# Altium PCB Hx711工训赛.pcbdoc
Units mm, origin at the board's own origin, x right, y up, seen from the top; angles counter-clockwise.
Board outline 45.13 x 45.13 mm, 2 copper layers (Top Layer, Bottom Layer); 11 components, 11 nets, 43 pads, 0 vias.
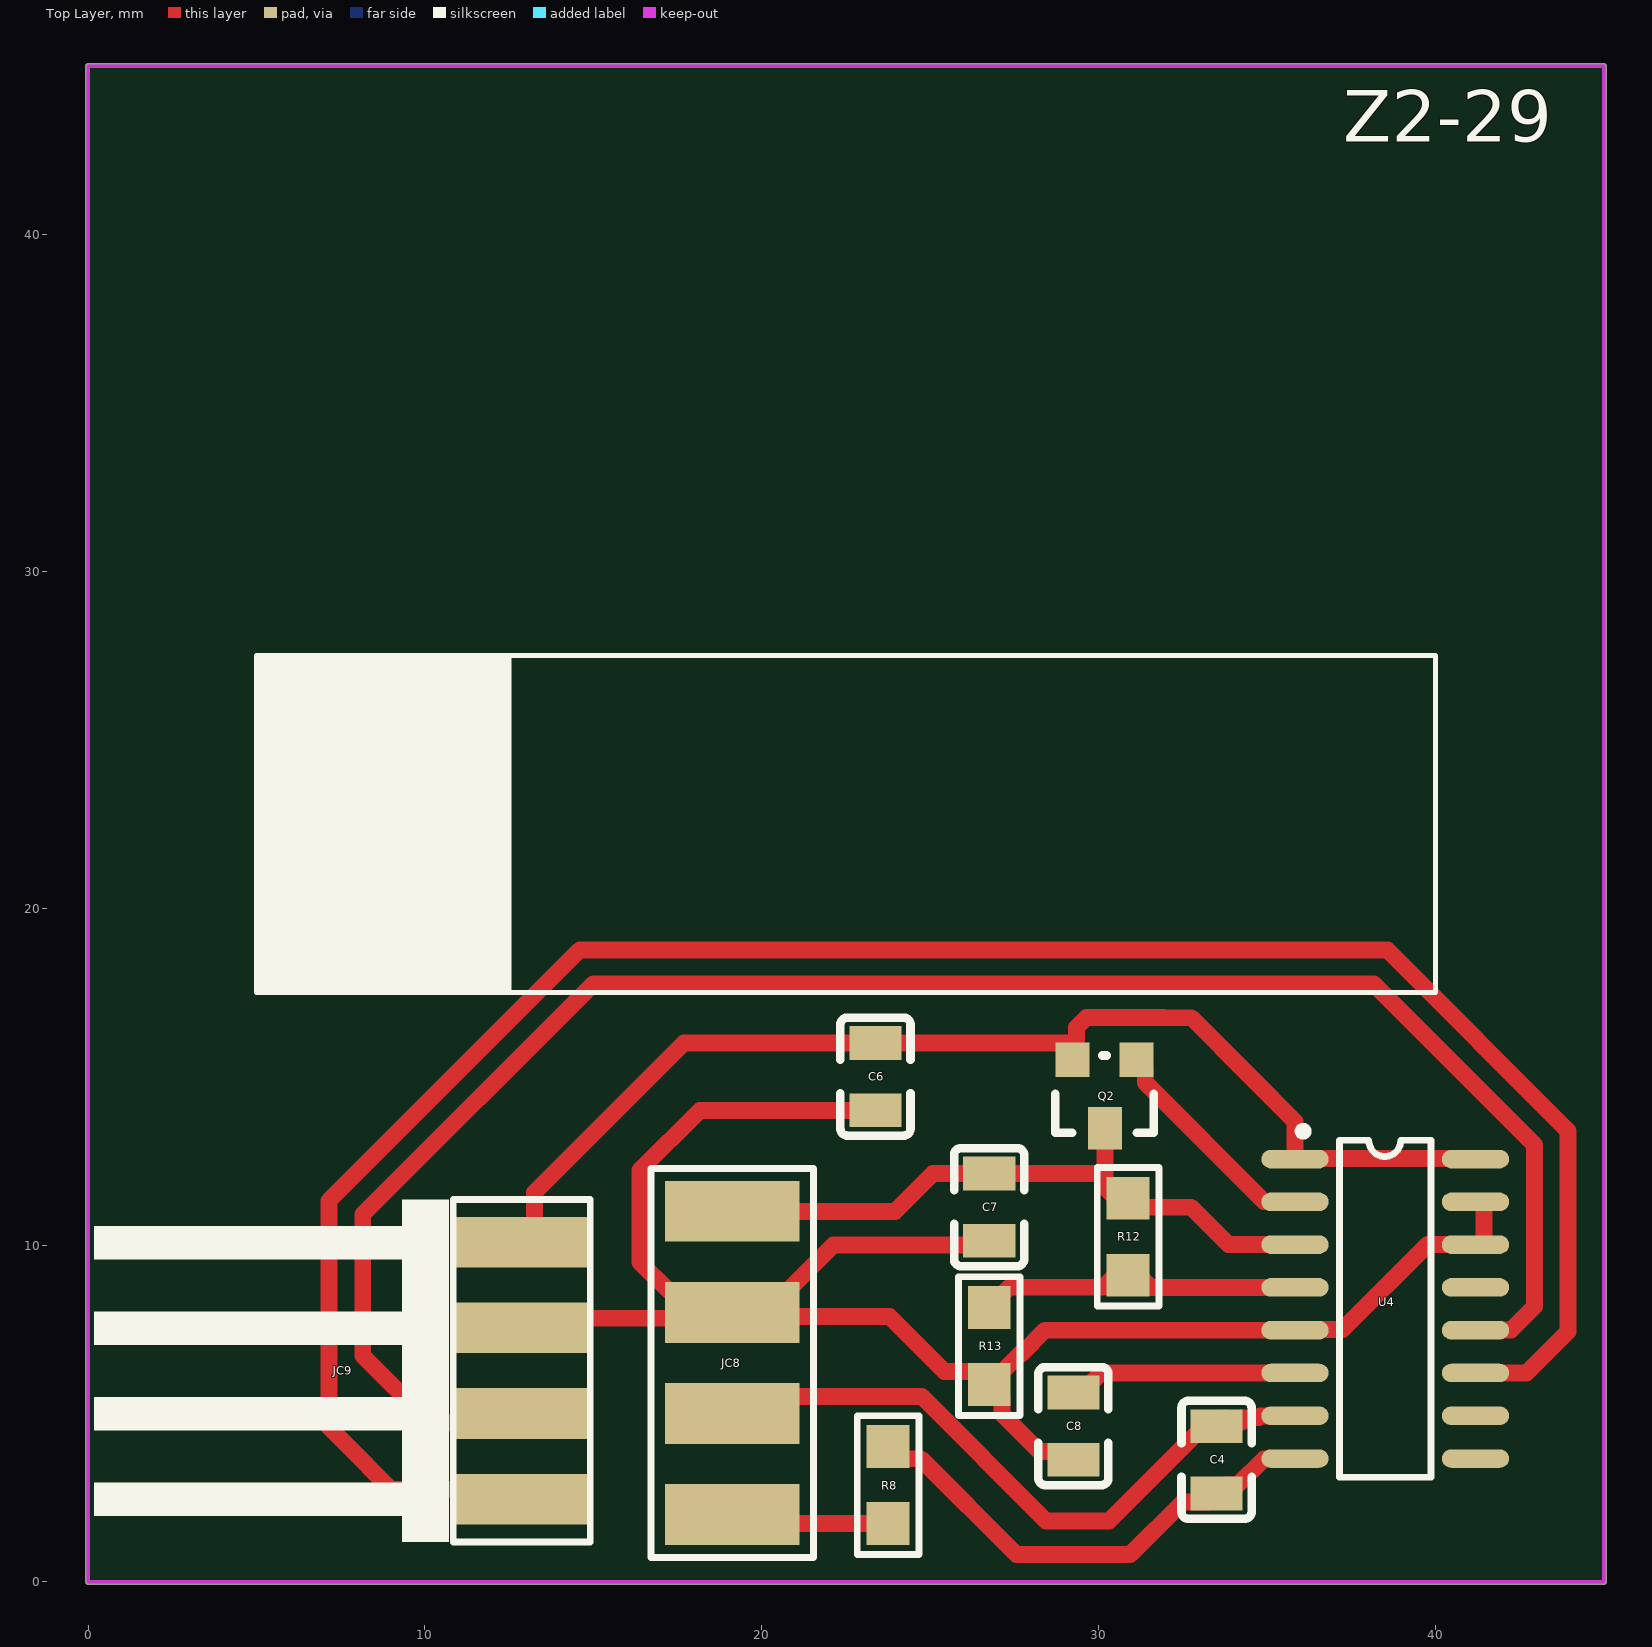
[diagram p0: Top Layer view]
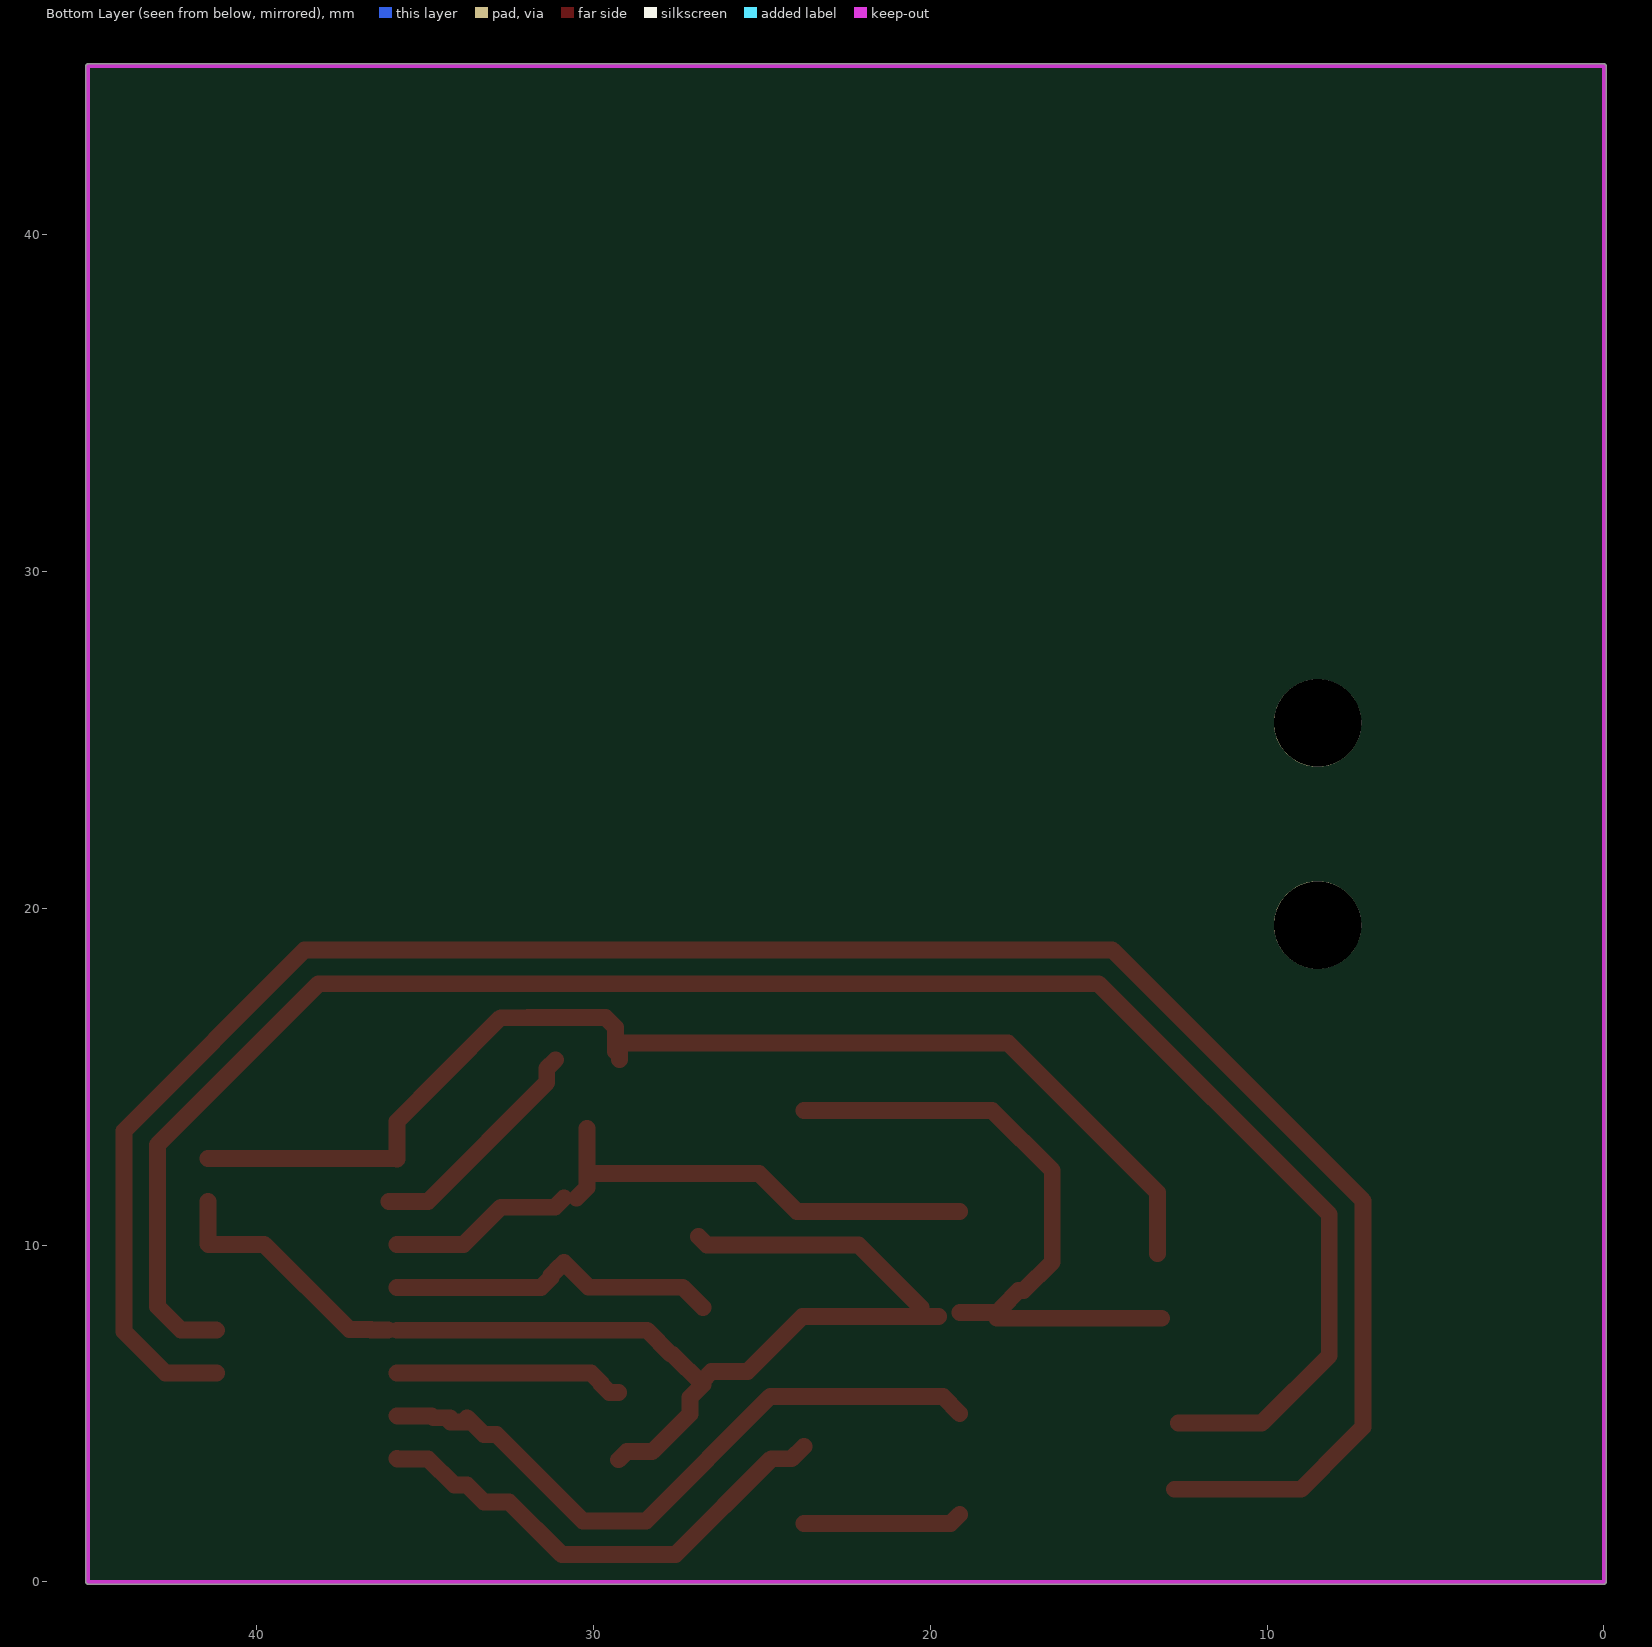
[diagram p1: Bottom Layer view, seen from below]

## Layer stack, top to bottom
Top Solder: solder mask 0.0102, Solder Resist, Dk 3.5
Top Layer: signal copper 0.0356
Dielectric1: dielectric 0.32, FR-4, Dk 4.8
Bottom Layer: signal copper 0.0356
Bottom Solder: solder mask 0.0102, Solder Resist, Dk 3.5

## Board outline
0,-0.064 cw(c0,0) -0.064,0 -0.064,45 cw(c0,45) 0,45.064 45,45.064 cw(c45,45) 45.064,45 45.064,0 cw(c45,0) 45,-0.064
cut-out: -38.227,-38.227 -37.973,-38.227 -37.973,-37.973 -38.227,-37.973

## Design rules (kind name [scope] priority, off if disabled: settings)
Clearance [All] p1: gap=0.5 ignorepadtopadclearanceinfootprint=FALSE
HoleToHoleClearance [All] p1 off: gap=0.254 allowstackedmicrovias=TRUE
MinimumSolderMaskSliver [All] p1 off: minsoldermaskwidth=0.254
PolygonConnect [All] p1: connectstyle=Relief reliefconductorwidth=0.254 reliefentries=4 polygonreliefangle="90 Angle" airgapwidth=0.254
RoutingVias [All] p1: holewidth=0.711 width=1.27 viastyle="Through Hole" minholewidth=0.711 minwidth=1.27 maxholewidth=0.711 maxwidth=1.27
SilkToSilkClearance [All] p1 off: silktosilkclearance=0.254
SilkToSolderMaskClearance [IsPad] p1 off: minsilkscreentomaskgap=0.254 clearancetoexposedcopper=TRUE
SolderMaskExpansion [All] p1: expansion=0.102 istentingtop=FALSE
Width [All] p1: maxlimit=1 minlimit=0.254 preferedwidth=0.5 toplayer_minwidth=0.5 toplayer_maxwidth=0.5 bottomlayer_prefwidth=0.254 minimp=50.000000 maximp=50.000000 favimp=50.000000
26 further rules are at their usual default settings.

## Classes and differential pairs
component class HX711: C4 C6 C8 JC8 JC9 Q2 R8 R12 R13 U4

## Components (designator, comment, footprint, x,y, rotation, side; value= is the part's Value field where it differs from the comment)
C4 "" C0805 33.5,3.625 r90 top value=0.1U
C6 "1U" C0805 23.375,15 r90 top
C7 "" C0805 26.75,11.125 r90 top value=1U
C8 "" C0805 29.25,4.625 r90 top value=1U
JC8 "SIP6" CZL-WIRE-4 19.125,6.5 r270 top
JC9 "排针" HDR-W-2.54_1X4 12.875,6.27 r0 top
Q2 "8550" SOT23 31.249,15.516 r180 top
R8 "" "R 0805" 23.75,2.875 r90 top value=1K
R12 "" "R 0805" 30.875,10.25 r270 top value=20K
R13 "" "R 0805" 26.75,7 r90 top value=8.2K
U4 "HX711-BF" SOP16 38.494,8.108 r0 top

## Footprints (in the part's own frame and the unit in brackets; to place one, negate y for a bottom-side part, rotate by r counter-clockwise, add the part's x,y. Pads: shape width x height; smd on the part's side, far side on the other; paste and mask are expansions set on the pad)
C0805 [mm]
  rect 1x1.55 smd: 1(-1,0) 2(1,0)
  silkscreen extent -1.75,-1.04 1.75,1.04
CZL-WIRE-4 [mm]
  rect 1.8x4 smd: 1(-4.5,0) 2(-1.5,0) 3(1.5,0) 4(4.5,0)
  silkscreen extent -5.77,-2.41 5.77,2.41
HDR-W-2.54_1X4 [mm]
  rect 4x1.5 smd: 1(0,-3.81) 2(0,-1.27) 3(0,1.27) 4(0,3.81)
  silkscreen extent -12.7,-5.08 2.03,5.08
"R 0805" [mil]
  rect 50x50 smd: 1(-45,0) 2(45,0)
  silkscreen extent -81,-36 81,36, body extent -39,-25 39,25, height 20
SOP16 [mm]
  oval 2x0.55 smd: 1(-2.667,4.445) 2(-2.667,3.175) 3(-2.667,1.905) 4(-2.667,0.635) 5(-2.667,-0.635) 6(-2.667,-1.905) 7(-2.667,-3.175) 8(-2.667,-4.445) 9(2.692,-4.445) 10(2.692,-3.175) 11(2.692,-1.905) 12(2.692,-0.635) 13(2.692,0.635) 14(2.692,1.905) 15(2.692,3.175) 16(2.692,4.445)
  silkscreen extent -2.55,-5 1.37,5.39, body extent -2.92,-4.99 2.98,4.99, height 1.45
SOT23 [mil]
  rect 40x40 smd: 1(4.88,0.63) 3(79.88,0.63)
  rect 40x50 smd: 2(41.88,80.63)
  silkscreen extent -15,-4 100,86, body extent -15,-11 99,99, height 47

## Part data
C4 C6 C7 C8: library part Cap, "Capacitor", LatestRevisionDate=17-Jul-2002, LatestRevisionNote="Re-released for DXP Platform.", PackageDescription="Radial Cap, Thru-Hole; 2 Leads; 0.3 in Pin Spacing", PackageReference=RAD-0.3, Published=8-Jun-2000, Publisher="Altium Limited"
JC8: library part 传感器
R8 R12 R13: library part Res2, "Resistor", LatestRevisionDate=17-Jul-2002, LatestRevisionNote="Re-released for DXP Platform.", PackageDescription="Axial Device, Thru-Hole; 2 Leads; 0.4 in Pin Spacing", PackageReference=AXIAL-0.4, Published=8-Jun-2000, Publisher="Altium Limited"
U4: library part HX711

## Free pads (board coordinates)
  round 2.6 hole 2.6: 0(8.5,19.5) 0(8.5,25.5)

## Nets (pads, with @x,y where several pads share a name; then routed paths per layer and width w, separated by ;. In a path a pad name is that pad's centre, name@x,y a point inside that pad or via, vN(x,y) a via of type N, cw(c..) or ccw(c..) an arc to the next point about the centre after c; other vN are vias at no path point)
AVDD: C7.2 JC8.1 Q2.2 R12.1 U4.3 | length 19.1
  Top Layer w0.5: JC8.1 23.961,11 25.086,12.125 C7.2 30.004,12.125 ; Q2.2 30.185,12.125 30.185,11.708 R12.1@30.5,11.393 ; R12.1 31.143,11.125 32.743,11.125 33.855,10.013 U4.3
GND: C6.1 C7.1 C8.1 JC8.2 JC9.3 R13.1 U4.5 U4.14 U4.15 | length 55.6
  Top Layer w0.5: JC9.3@13.125,7.83 JC8.2@18.025,7.83 ; JC8.2 17.875,8 17.875,8.15 17.375,8.65 17.225,8.65 16.375,9.5 16.375,12.211 18.164,14 C6.1@23.75,14 ; JC8.2@19.75,7.875 23.789,7.875 25.422,6.242 26.49,6.242 R13.1@26.75,5.982 ; JC8.2@20.273,8.148 22.125,10 26.625,10 C7.1@26.875,10.25 ; C8.1 29,3.875 28.25,3.875 27.135,4.99 27.135,5.472 R13.1 27.651,6.758 27.696,6.758 28.411,7.473 U4.5 ; U4.5@36.09,7.483 36.597,7.483 36.604,7.49 37.24,7.49 39.77,10.02 41.423,10.02 U4.14@41.433,10.03 ; U4.14@41.442,10.03 U4.15@41.442,11.3
NetC4_1: C4.1 R8.2 U4.8 | length 14.6
  Top Layer w0.5: R8.2 24.112,3.656 24.719,3.656 27.562,0.813 30.939,0.813 32.5,2.375 33.25,2.375 33.75,2.875 34.125,2.875 34.904,3.654 35.818,3.654 U4.8
NetC4_2: C4.2 JC8.3 U4.7 | length 19.7
  Top Layer w0.5: JC8.3 19.625,5.5 24.75,5.5 28.437,1.813 30.313,1.813 32.875,4.375 33.25,4.375 C4.2@33.75,4.875 ; C4.2@33.75,4.75 C4.2@34.25,4.75 ; C4.2@34.25,4.875 34.75,4.875 34.799,4.924 35.818,4.924 U4.7
NetJC8_4: JC8.4 R8.1 | length 4.7
  Top Layer w0.5: JC8.4 19.393,1.732 R8.1
NetJC9_2: JC9.2 U4.12 | length 55.9
  Top Layer w0.5: JC9.2@12.625,4.716 10.159,4.716 8.153,6.722 8.153,10.903 15.008,17.758 38.156,17.758 42.937,12.978 42.937,8.176 42.244,7.483 41.196,7.483 U4.12
NetJC9_3: JC9.1 U4.11 | length 64.4
  Top Layer w0.5: JC9.1@12.75,2.75 8.998,2.75 7.614,4.134 7.153,4.595 7.153,11.317 14.594,18.758 38.571,18.758 43.937,13.392 43.937,7.437 42.703,6.203 U4.11
NetQ2_1: Q2.1 U4.2 | length 6.9
  Top Layer w0.5: Q2.1 31.383,15.242 31.383,14.823 34.913,11.293 U4.2@36.076,11.293
NetR12_2: R12.2 R13.2 U4.4 | length 9.9
  Top Layer w0.5: R13.2 27.357,8.75 30.143,8.75 R12.2@30.875,9.482 ; R12.2@30.875,9.375 30.982,9.375 31.26,9.097 31.26,9.036 31.553,8.743 U4.4
VBG: C8.2 U4.6 | length 6.8
  Top Layer w0.5: C8.2 29.525,5.625 29.775,5.875 29.775,5.91 30.068,6.203 U4.6
VCC: C6.2 JC9.4 Q2.3 U4.1 U4.16 | length 35.3
  Top Layer w0.5: JC9.4@13.25,9.75 13.25,11.56 17.69,16 29.084,16 29.22,15.864 Q2.3 ; Q2.3@29.34,15.745 29.34,16.457 29.64,16.758 31.944,16.758 31.952,16.75 32.75,16.75 34.5,15 35.827,13.673 U4.1 ; U4.1@35.898,12.57 U4.16@41.442,12.57
pads on no net: U4.9 U4.10 U4.13

## Keep-outs
Keep-Out Layer:
  lines w0.127: 0,0 45,0 45,45 0,45 0,0

## Silkscreen, mask and mechanical layers (free items; w line width, h text height)
Top Overlay:
  rectangle: 5,17.5 12.55,27.5
  lines w0.15: 12.5,17.5 12.5,27.5 ; 5,17.5 40,17.5 40,27.5 5,27.5 5,17.5
  text "Z2-29" at 37.254,42.754 h1.52